# Altium PCB RoomSensor.PcbDoc
Units mil, origin at the board's own origin, x right, y up, seen from the top; angles counter-clockwise.
Board outline 2550 x 1330 mil, 2 copper layers (L1, L2), stack 62.8 mil thick; 26 components, 16 nets, 84 pads, 10 vias.
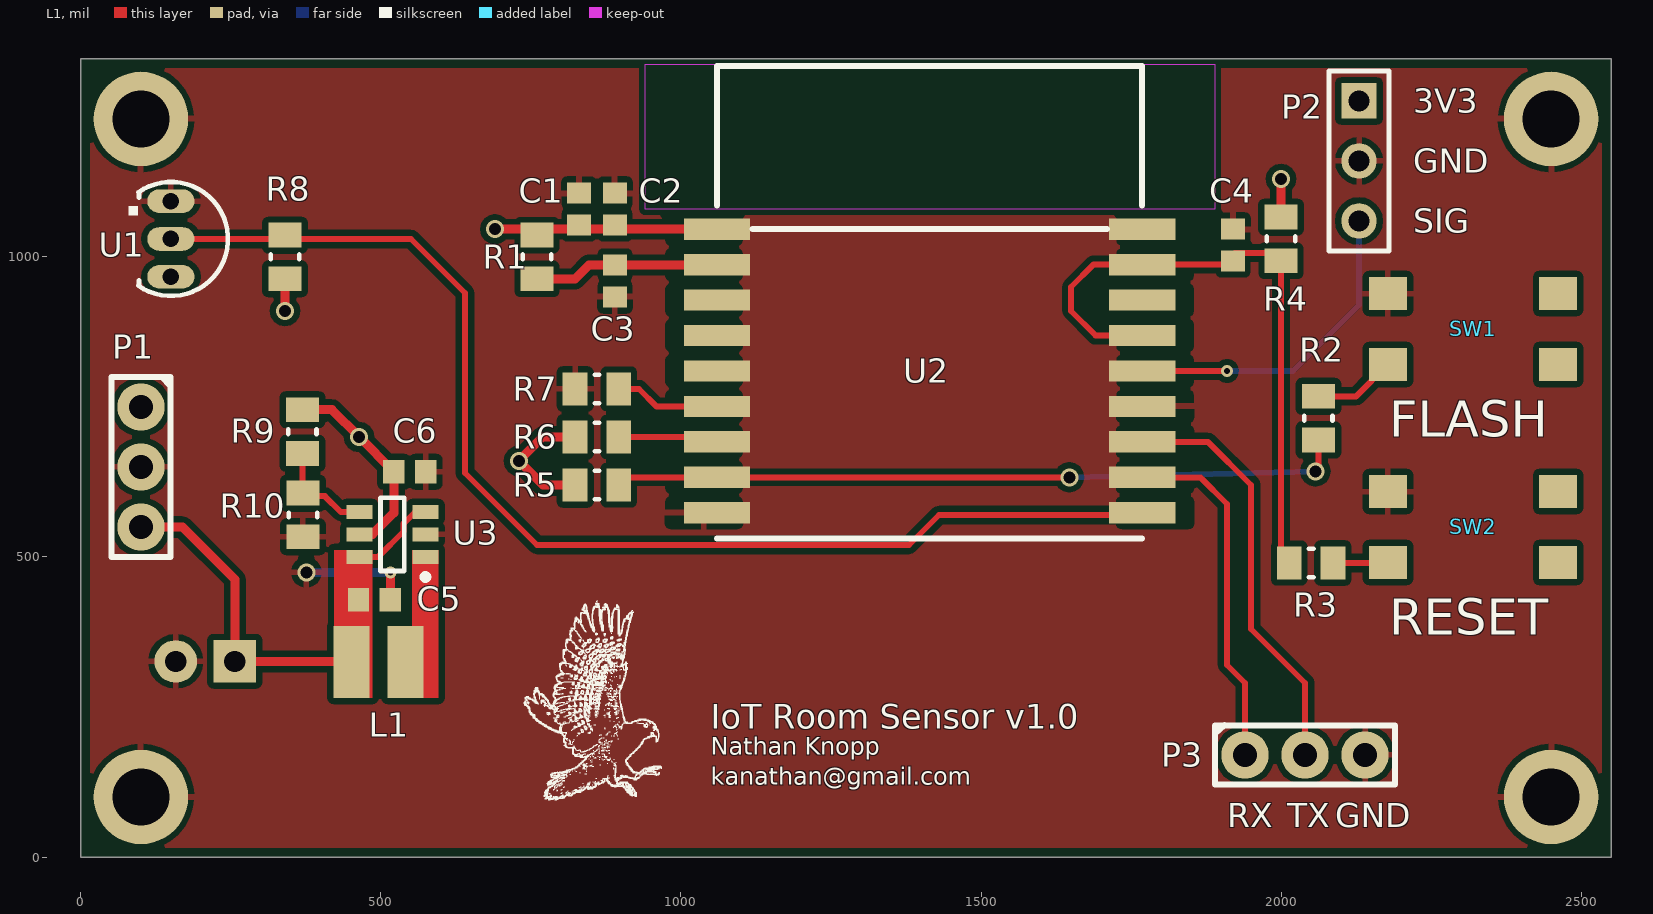
[diagram p0: L1 view]
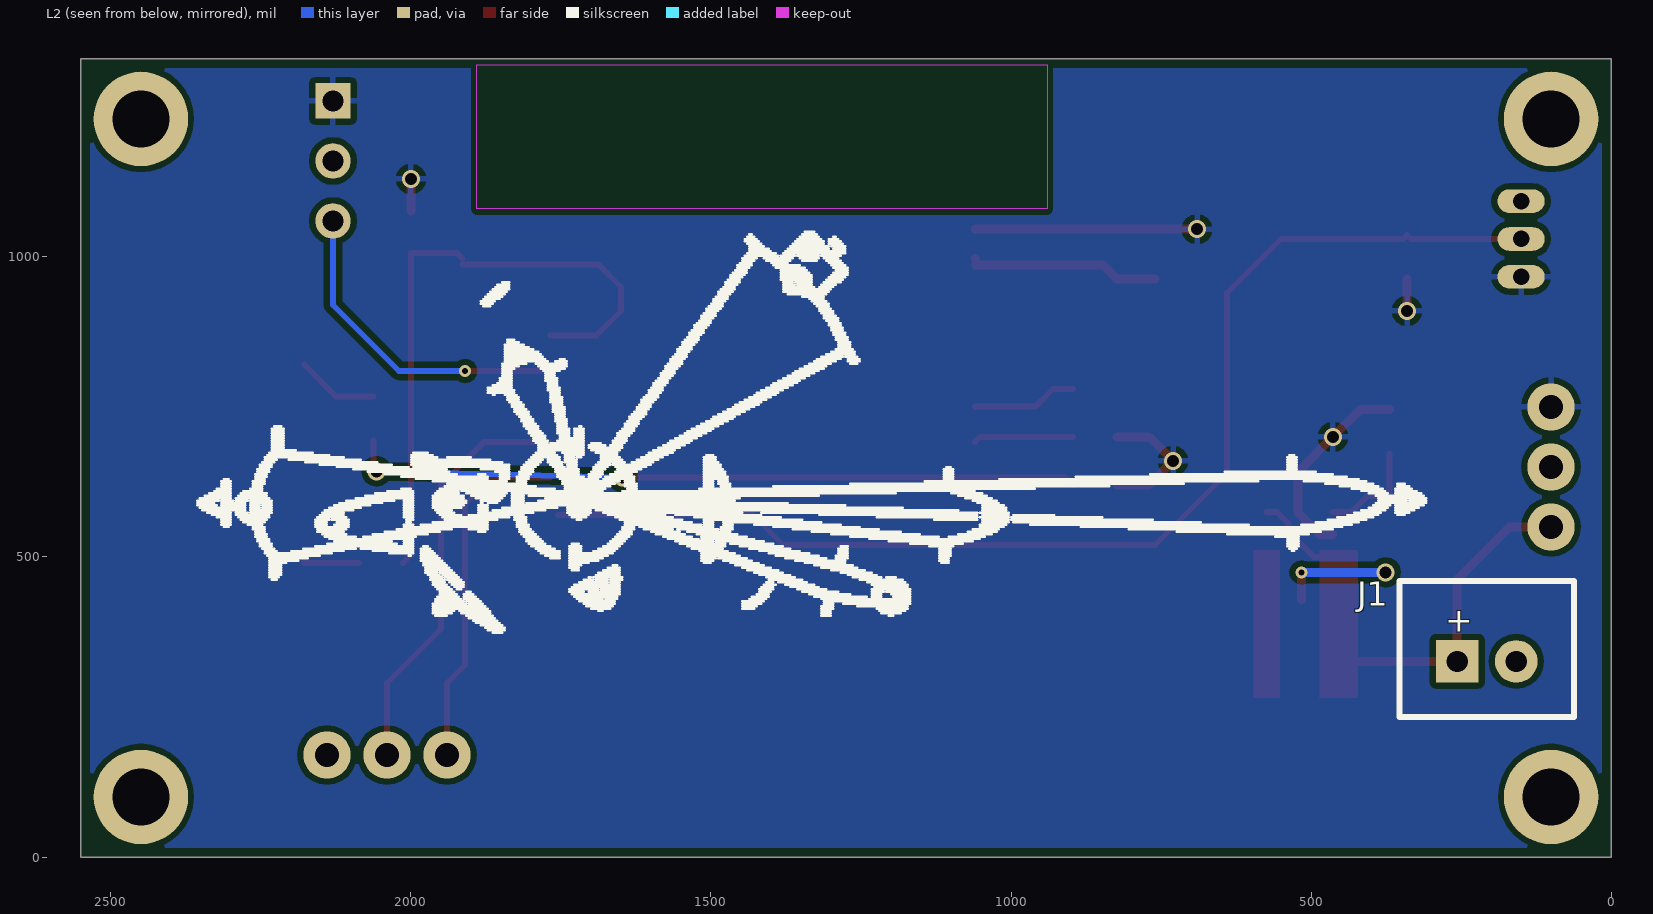
[diagram p1: L2 view, seen from below]

## Layer stack, top to bottom
Top Solder: solder mask 0.1, Solder Resist, Dk 0
L1: signal copper 1.4
Core: dielectric 60, FR-4, Dk 4.6
L2: signal copper 1.4
Bottom Solder: solder mask 0.1, Solder Resist, Dk 0

## Board outline
0,0 2550,0 2550,1330 0,1330

## Design rules (kind name [scope] priority, off if disabled: settings)
BoardOutlineClearance [All] p1: gap=15 ignorepadtopadclearanceinfootprint=FALSE except(3: Text-OutlineEdge Text-CavityEdge Text-CutoutEdge Text-SplitBarrior Text-SplitContinuation; 5: Track-OutlineEdge Track-CavityEdge Track-CutoutEdge Track-SplitBarrior Track-SplitContinuation)
Clearance [All] p1: gap=10 ignorepadtopadclearanceinfootprint=FALSE except(0: Arc-Hole Track-Hole SMDPad-Hole THPad-Hole Via-Hole Fill-Hole Poly-Hole Region-Hole Text-Hole)
HoleSize [All] p1: absolutevalues=TRUE maxlimit=100 minlimit=10 maxpercent=80.000 minpercent=20.000
MinimumAnnularRing [All] p1: minimumring=5
MinimumSolderMaskSliver [All] p1: minsoldermaskwidth=4
PolygonConnect [All] p1: connectstyle=Relief reliefconductorwidth=10 reliefentries=4 polygonreliefangle="90 Angle" airgapwidth=10
RoutingVias [All] p1: holewidth=20 width=30 viastyle="Through Hole" minholewidth=10 minwidth=20 maxholewidth=28 maxwidth=50
SilkToSolderMaskClearance [IsPad] p1: minsilkscreentomaskgap=4 clearancetoexposedcopper=TRUE
SolderMaskExpansion [All] p1: expansion=4
UnRoutedNet [All] p1: checkbadconnections=TRUE
Width [All] p1: maxlimit=15 minlimit=10 preferedwidth=10
26 further rules are at their usual default settings.

## Components (designator, comment, footprint, x,y, rotation, side; value= is the part's Value field where it differs from the comment)
C1 "0603C-10u" CHIP_0603 830,1080 r90 top value=10uF
C2 "0603C-100n" CHIP_0603 890,1080 r90 top value=100nF
C3 "0603C-100n" CHIP_0603 890,960 r270 top value=100nF
C4 "0603C-100n" CHIP_0603 1920,1020 r90 top value=100nF
C5 "0603C-4.7u" CHIP_0603 489,429 r0 top value=4.7uF
C6 "0603C-10u" CHIP_0603 548,642 r180 top value=10uF
J1 "JST_XH_2x1" JST_XH_2x1 256.43,326 r180 bottom
L1 "ME3220-472MLB" ME3220-472MLB 541,325 r180 top value=4.7uH
P1 "Boost Convrt" "3x1 Header" 100,750 r270 top
P2 "PIR" HDR1X3 2130,1260 r270 top
P3 "TTL" "3x1 Header" 1940,170 r0 top
R1 "0805R-10k" Chip_0805 760,1000 r270 top value=10k
R2 "0805R-470" Chip_0805 2062.25,731.42 r270 top value=470
R3 "0805R-470" Chip_0805 2050,490 r180 top value=470
R4 "0805R-10k" Chip_0805 2000,1030 r270 top value=10k
R5 "0805R-10k" Chip_0805 860,620 r0 top value=10k
R6 "0805R-10k" Chip_0805 860,700 r0 top value=10k
R7 "0805R-10k" Chip_0805 860,780 r0 top value=10k
R8 "0805R-4.7k" Chip_0805 340,1000 r270 top value=4.7k
R9 "0805R-1.69M" Chip_0805 369,709 r90 top value=1.69M
R10 "0805R-1M" Chip_0805 370,570 r90 top value=1M
SW1 "FLASH" TL3305AF260QG 2320,880 r0 top
SW2 "RESET" TL3305AF260QG 2320,550 r0 top
U1 "MAX31820" TO-92 150,1030 r180 top
U2 "ESP-WROOM-02" ESP-WROOM-02 1060,1046.22 r0 top
U3 "MCP16251" "SOT23 MCP16251" 519.08,537.55 r180 top

## Footprints (in the part's own frame and the unit in brackets; to place one, negate y for a bottom-side part, rotate by r counter-clockwise, add the part's x,y. Pads: shape width x height; smd on the part's side, far side on the other; paste and mask are expansions set on the pad)
"3x1 Header" [mm] "3x1 Header"
  round 2 hole 1: 1(0,0) 2(2.54,0) 3(5.08,0)
  silkscreen extent -1.27,-1.25 6.35,1.26
CHIP_0603 [mm] "Chip Capacitor, 2-Leads, Body 1.60x0.80mm, IPC Medium Density"
  rect 0.9x1 smd: 1(-0.675,0) 2(0.675,0)
  body extent -0.87,-0.48 0.87,0.47, height 0.8
Chip_0805 [mm] "Chip Capacitor, 2-Leads, Body 2.00x1.25mm, IPC Medium Density"
  rect 1.05x1.4 smd: 1(-0.925,0) 2(0.925,0)
  silkscreen extent -0.1,-0.6 0.1,0.6, body extent -1.05,-0.67 1.05,0.67, height 0.6
ESP-WROOM-02 [mm] "ESP-WROOM-02"
  rect 2.8x0.9 smd: 1(0,0) 2(0,-1.5) 3(0,-3) 4(0,-4.5) 5(0,-6) 6(0,-7.5) 7(0,-9) 8(0,-10.5) 9(0,-12) 10(18,-12) 11(18,-10.5) 12(18,-9) 13(18,-7.5) 14(18,-6) 15(18,-4.5) 16(18,-3) 17(18,-1.5) 18(18,0)
  silkscreen extent 0,-13.1 18,6.9, body extent 0,-13.1 18,6.9, height 2
HDR1X3 [mm] "Connector; Header; 3 Position"
  rect 1.5x1.5 hole 0.9: 1(0,0)
  round 1.5 hole 0.9: 2(2.54,0) 3(5.08,0)
  silkscreen extent -1.27,-1.27 6.35,1.27
JST_XH_2x1 [mm] "JST HX 2pin, 1row, 2.5mm pitch"
  rect 1.8x1.8 hole 0.9: 1(0,0)
  round 1.8 hole 0.9: 2(2.5,0)
  silkscreen extent -2.45,-2.35 4.95,3.4
ME3220-472MLB [mil] "ME3220-472MLB"
  rect 60x120 smd: 1(0,0) 2(90,0)
  body extent -18,-55 108,55, height 79
"SOT23 MCP16251" [mm] "SOT23, 6-Leads, Body 2.90x2.70mm, Pitch 0.95mm, IPC Medium Density"
  rect 1.1x0.6 smd: 1(-1.4,0.95) 2(-1.4,0) 3(-1.4,-0.95) 4(1.4,-0.95) 5(1.4,0) 6(1.4,0.95)
  silkscreen extent -1.53,-1.55 0.5,1.92, body extent -0.9,-1.55 0.9,1.55, height 1.45
TL3305AF260QG [mm] "TL3305AF260QG"
  rect 1.6x1.4 smd: 1(-3.6,-1.5) 2(3.6,-1.5) 3(-3.6,1.5) 4(3.6,1.5)
  body extent -2.25,-2.25 2.25,2.25, height 4.8
TO-92 [mm] "TO, Flat Index; 3 In-Line, Axial Leads; Body Dia. 4.6mm; Leads 0.41 x 0.39 mm (max)"
  oval 2x1 hole 0.7: 1(0,-1.6) 2(0,0) 3(0,1.6)
  silkscreen extent -2.41,-2.41 1.8,2.41

## Part data
C1 C6: Supplier Part Number 1=587-6012-6-ND, LatestRevisionDate=17-Jul-2002, LatestRevisionNote="Re-released for DXP Platform.", PackageDescription="Radial Cap, Thru-Hole; 2 Leads; 0.3 in Pin Spacing", PackageReference=RAD-0.3, Published=8-Jun-2000, Publisher="Altium Limited", Supplier 1=Digi-Key, Supplier 2=Mouser, Supplier Part Number 2=963-JMK107ABJ106KA-T
C2 C3 C4: Supplier Part Number 1=80-C0603C104K8RAC, LatestRevisionDate=17-Jul-2002, LatestRevisionNote="Re-released for DXP Platform.", PackageDescription="Radial Cap, Thru-Hole; 2 Leads; 0.3 in Pin Spacing", PackageReference=RAD-0.3, Published=8-Jun-2000, Publisher="Altium Limited", Supplier 1=Mouser
C5: Supplier Part Number 1=311-1521-6-ND, LatestRevisionDate=17-Jul-2002, LatestRevisionNote="Re-released for DXP Platform.", PackageDescription="Radial Cap, Thru-Hole; 2 Leads; 0.3 in Pin Spacing", PackageReference=RAD-0.3, Published=8-Jun-2000, Publisher="Altium Limited", Supplier 1=Digi-Key, Supplier 2=Mouser, Supplier Part Number 2=603-CC603KRX5R5BB475
J1: "JST XH Header 2 pin, 1 row, 2.5mm pitch"
P1 P2: library part "Header 3", "Header, 3-Pin", LatestRevisionDate=17-Jul-2002, LatestRevisionNote="Re-released for DXP Platform.", Publisher="Altium Limited"
P3: library part "Header 3H", "Header, 3-Pin, Right Angle", LatestRevisionDate=17-Jul-2002, LatestRevisionNote="Re-released for DXP Platform.", Publisher="Altium Limited"
R1 R4 R5 R6 R7: Supplier Part Number 1=603-RC0805FR-0710KL, LatestRevisionDate=17-Jul-2002, LatestRevisionNote="Re-released for DXP Platform.", PackageDescription="Axial Device, Thru-Hole; 2 Leads; 0.3 in Pin Spacing", PackageReference=AXIAL-0.3, Published=8-Jun-2000, Publisher="Altium Limited", Supplier 1=Mouser, Supplier 2=Digi-Key, Supplier 3=Digi-Key, Supplier 4=Digi-Key, Supplier 5=Newark, Supplier 6=Newark, Supplier Part Number 2=311-10.0KCRTR-ND, Supplier Part Number 3=311-10.0KCRCT-ND, Supplier Part Number 4=311-10.0KCRDKR-ND, Supplier Part Number 5=66R2896, Supplier Part Number 6=68R0229
R2 R3: Supplier Part Number 1=603-RC0805FR-07470RL, LatestRevisionDate=17-Jul-2002, LatestRevisionNote="Re-released for DXP Platform.", PackageDescription="Axial Device, Thru-Hole; 2 Leads; 0.3 in Pin Spacing", PackageReference=AXIAL-0.3, Published=8-Jun-2000, Publisher="Altium Limited", Supplier 1=Mouser, Supplier 2=Digi-Key, Supplier 3=Digi-Key, Supplier 4=Digi-Key, Supplier Part Number 2=311-470CRTR-ND, Supplier Part Number 3=311-470CRCT-ND, Supplier Part Number 4=311-470CRDKR-ND
R8: Supplier Part Number 1=603-RC0805FR-074K7L, LatestRevisionDate=17-Jul-2002, LatestRevisionNote="Re-released for DXP Platform.", PackageDescription="Axial Device, Thru-Hole; 2 Leads; 0.3 in Pin Spacing", PackageReference=AXIAL-0.3, Published=8-Jun-2000, Publisher="Altium Limited", Supplier 1=Mouser, Supplier 2=Digi-Key, Supplier 3=Newark, Supplier 4=Digi-Key, Supplier 5=Digi-Key, Supplier 6=Newark, Supplier Part Number 2=311-4.70KCRCT-ND, Supplier Part Number 3=66R3271, Supplier Part Number 4=311-4.70KCRTR-ND, Supplier Part Number 5=311-4.70KCRDKR-ND, Supplier Part Number 6=68R0243
R9: Supplier Part Number 1=603-RC0805FR-071M69L, LatestRevisionDate=17-Jul-2002, LatestRevisionNote="Re-released for DXP Platform.", PackageDescription="Axial Device, Thru-Hole; 2 Leads; 0.3 in Pin Spacing", PackageReference=AXIAL-0.3, Published=8-Jun-2000, Publisher="Altium Limited", Supplier 1=Mouser, Supplier 2=Digi-Key, Supplier 3=Digi-Key, Supplier Part Number 2=311-1.69MCRCT-ND, Supplier Part Number 3=311-1.69MCRDKR-ND
R10: Supplier Part Number 1=311-1.00MCRCT-ND, LatestRevisionDate=17-Jul-2002, LatestRevisionNote="Re-released for DXP Platform.", PackageDescription="Axial Device, Thru-Hole; 2 Leads; 0.3 in Pin Spacing", PackageReference=AXIAL-0.3, Published=8-Jun-2000, Publisher="Altium Limited", Supplier 1=Digi-Key, Supplier 2=Mouser, Supplier 3=Digi-Key, Supplier Part Number 2=603-RC0805FR-071ML, Supplier Part Number 3=311-1.00MCRDKR-ND
SW1 SW2: library part SW_PB, "TL3305AF260QG", Supplier Part Number 1=612-TL3305AF260QG, Supplier 1=Mouser, Supplier 2=Digi-Key, Supplier Part Number 2=EG5353DKR-ND
U1: Supplier Part Number 1=MAX31820MCR+-ND, Supplier 1=Digi-Key, Supplier 2=Mouser, Supplier Part Number 2=700-MAX31820MCR+
U2: Supplier Part Number 1=356-ESP-WROOM-02, Supplier 1=Mouser
U3: library part MCP16251T, Supplier Part Number 1=579-MCP16251T-I/CH, Supplier 1=Mouser, Supplier 2=Digi-Key, Supplier 3=Digi-Key, Supplier 4=Digi-Key, Supplier Part Number 2=MCP16251T-I/CHTR-ND, Supplier Part Number 3=MCP16251T-I/CHCT-ND, Supplier Part Number 4=MCP16251T-I/CHDKR-ND
L1: Code_IEC=1005, Code_JEITA=0402, LatestRevisionDate=29-May-2009, LatestRevisionNote="IPC-7351 Footprint Added.", PackageDescription="Chip Inductor", PackageReference=0402-A, Published=8-Jun-2000, Publisher="Altium Limited"

## Free pads (board coordinates)
  round 157.48 hole 94.49: ""(100,100) ""(100,1230) ""(2450,100) ""(2450,1230)

## Via types
v1: diameter 30, hole 20, L1 to L2, 8 vias
v2: diameter 20, hole 10, L1 to L2, 2 vias

## Nets (pads, with @x,y where several pads share a name; then routed paths per layer and width w, separated by ;. In a path a pad name is that pad's centre, name@x,y a point inside that pad or via, vN(x,y) a via of type N, cw(c..) or ccw(c..) an arc to the next point about the centre after c; other vN are vias at no path point)
3V3: C1.1 C2.1 C6.2 P1.1 P2.1 R1.1 R4.1 R5.1 R6.1 R8.2 R9.2 U1.3 U2.1 U3.5 | length 1033.6
  L1 w15: v1(340,910) R8.2 ; R9.2 418.01,745.42 v1(463.43,700) C6.2 521.43,573.43 485.55,537.55 U3.5 ; v1(690,1046.22) U2.1 ; R5.1 770,620 v1(730,660) 770,700 R6.1 ; R4.1@2000,1076.42 v1(2000,1130)
EN: C3.1 R1.2 U2.2 | length 309.8
  L1 w15: R1.2 823.58,963.58 846.57,986.57 C3.1 U2.2@1059.41,986.57 ; U2.2@1059.41,996.57 U2.2@1060,997.17
GND: C1.2 C2.2 C3.2 C4.2 C5.2 C6.1 J1.2 P1.2 P2.2 P3.3 pad. R7.1 R10.1 SW1.3 SW2.3 U1.1 U2.9 U2.13 U2.18 U3.2 | length 185.4
  L1 w15: C5.2 v2(515.57,474.43)
  L2 w15: v1(375.57,474.43) v2(515.57,474.43)
GPIO0: R2.2 R5.2 U2.8 | length 1220.5
  L1 w10: R5.2 909.25,632.83 U2.8 v1(1647.17,632.83) ; v1(2057.17,642.83) 2062.25,647.91 R2.2
  L2 w10: v1(1647.17,632.83) v1(2057.17,642.83)
GPIO2: R6.2 U2.7 | length 166.9
  L1 w10: R6.2 1051.89,700 U2.7
GPIO15: R7.2 U2.6 | length 175.6
  L1 w10: R7.2 930,780 959.06,750.94 U2.6
NetL1_1: L1.1 U3.1
NetR2_1: R2.1 SW1.1 | length 138
  L1 w10: R2.1 2125.16,767.83 SW1.1
NetR3_1: R3.1 SW2.1 | length 92.2
  L1 w10: R3.1 2177.32,490 SW2.1
NetR8_1: R8.1 U1.2 U2.10 | length 2017.9
  L1 w10: U1.2 333.58,1030 R8.1 346.42,1030 550,1030 640,940 640,640 760,520 1380,520 1430,570 U2.10@1754.88,570
NetR9_1: R9.1 R10.2 U3.4 | length 177.1
  L1 w10: R9.1 369,601.42 406.58,601.42 433.05,574.95 U3.4
PIRout: P2.3 U2.14 | length 546.9
  L1 w10: U2.14 v2(1910,810)
  L2 w10: v2(1910,810) 2020,810 2130,920 P2.3
RST: C4.1 R3.2 R4.2 U2.15 U2.17 | length 1064.1
  L1 w10: U2.15 1690.94,869.06 1650,910 1650,950 1687.17,987.17 U2.17 C4.1@1913.74,987.17 ; C4.1@1913.74,997.17 1922.99,1006.42 R4.2@2000,1006.42 ; R4.2@2000,1003.58 R4.2 2000,503.58 R3.2
RX: P3.1 U2.11 | length 590.6
  L1 w10: U2.11 1865.54,632.83 1910,588.37 1910,320 1940,290 P3.1
TX: P3.2 U2.12 | length 698.4
  L1 w10: U2.12 1878.11,691.89 1950,620 1950,380 2040,290 P3.2
VBatt: C5.1 J1.1 L1.2 P1.3 U3.3 U3.6 | length 673.1
  L1 w10: U3.6 495.15,500.15 537.54,542.54 537.54,555.58 556.92,574.95 U3.3
  L1 w15: P1.3 169,550 256.43,462.57 J1.1 450,326 L1.2
pads on no net: SW1.2 SW1.4 SW2.2 SW2.4 U2.3 U2.4 U2.5 U2.16

## Polygon pours and split planes (outlines as drawn)
GND on L1 "GND_L01_P010" (solid, remove dead copper, pour order 10): 0,1330 0,0 2550,0 2550,1330
3V3 on L2 "3V3_L02_P012" (solid, remove dead copper, pour order 12): 0,1330 0,0 2550,0 2550,1330

## Keep-outs
Keep-Out Layer:
  rectangle: 940,1080 1890,1320

## Other copper
L1:
  region net VBatt: 486,265 486,512 422,512 422,265
  region net NetL1_1: 596,265 596,512 552,512 552,265

## Silkscreen, mask and mechanical layers (free items; w line width, h text height)
Top Overlay:
  drawing of 3455 lines, arcs and shapes, not listed
  text "3V3" at 2220,1240 h40
  text "GND" at 2220,1140 h40
  text "SIG" at 2220,1040 h40
  text "IoT Room Sensor v1.0" at 1050,200 h70
  text "Nathan Knopp / kanathan@gmail.com" at 1050,110 h50
  text "RX" at 1910,50 h40
  text "TX" at 2010,50 h40
  text "GND" at 2090,50 h40
Bottom Overlay:
  drawing of 955 lines, arcs and shapes, not listed
Mechanical 2:
  the board outline again, w10

## Text inside footprints (layer, text, board x,y; h text height)
J1: Bottom Overlay "+" at 276.11,375.21 h40